# Altium PCB PCB1.PcbDoc
Units mm, origin at the board's own origin, x right, y up, seen from the top; angles counter-clockwise.
Board outline 38.5 x 37 mm, 4 copper layers (L1(SIGNAL), L2(GND), L3(GND), L4(Signal)), stack 1.57 mm thick; 35 components, 27 nets, 170 pads, 52 vias.
Unrouted connection lines stored in the file: 3.
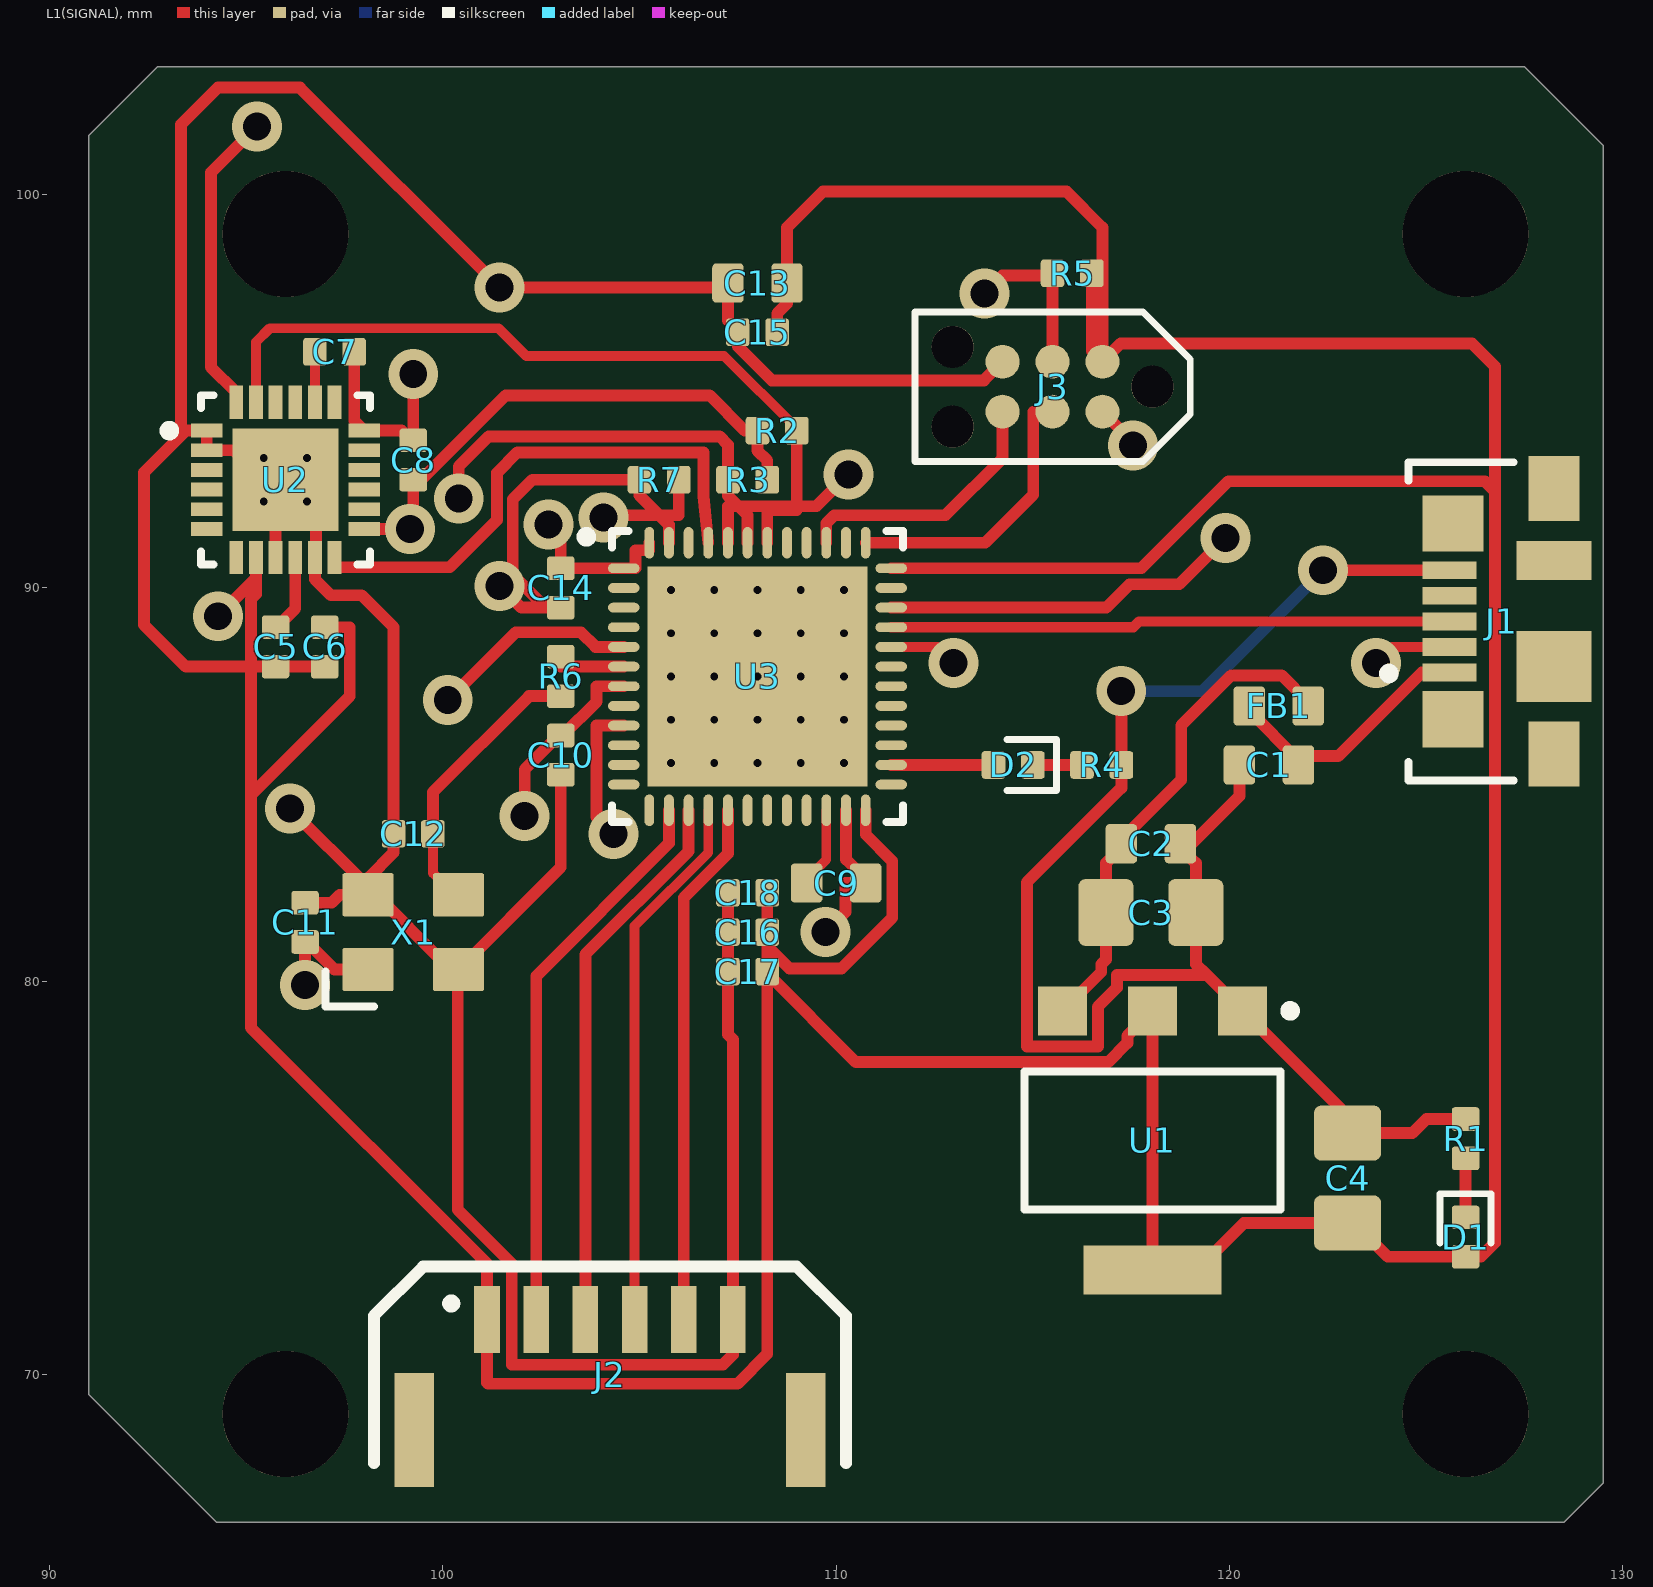
[diagram p0: L1(SIGNAL) view]
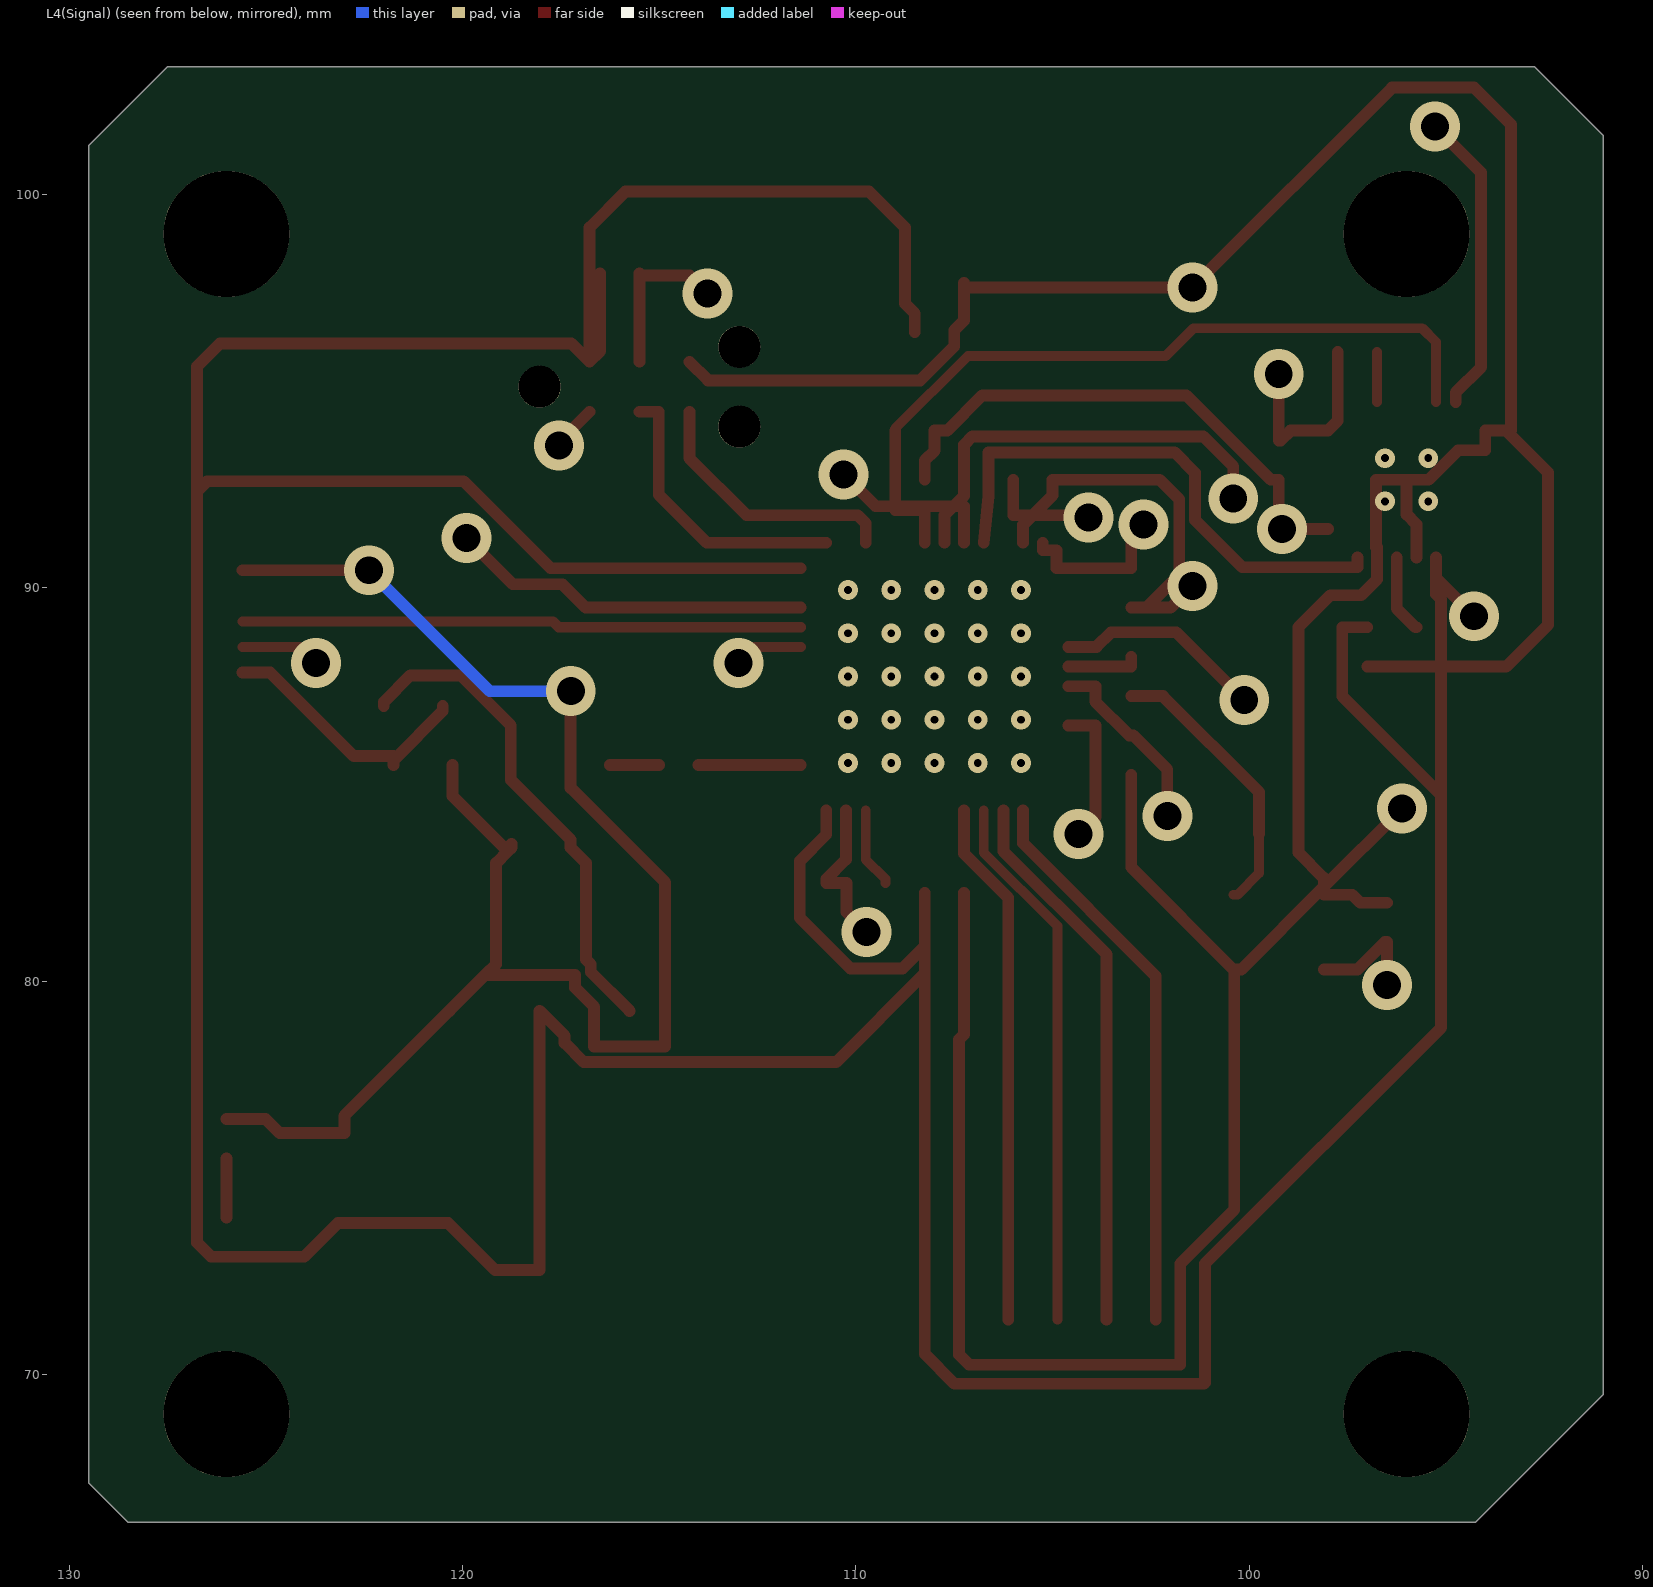
[diagram p1: L4(Signal) view, seen from below]
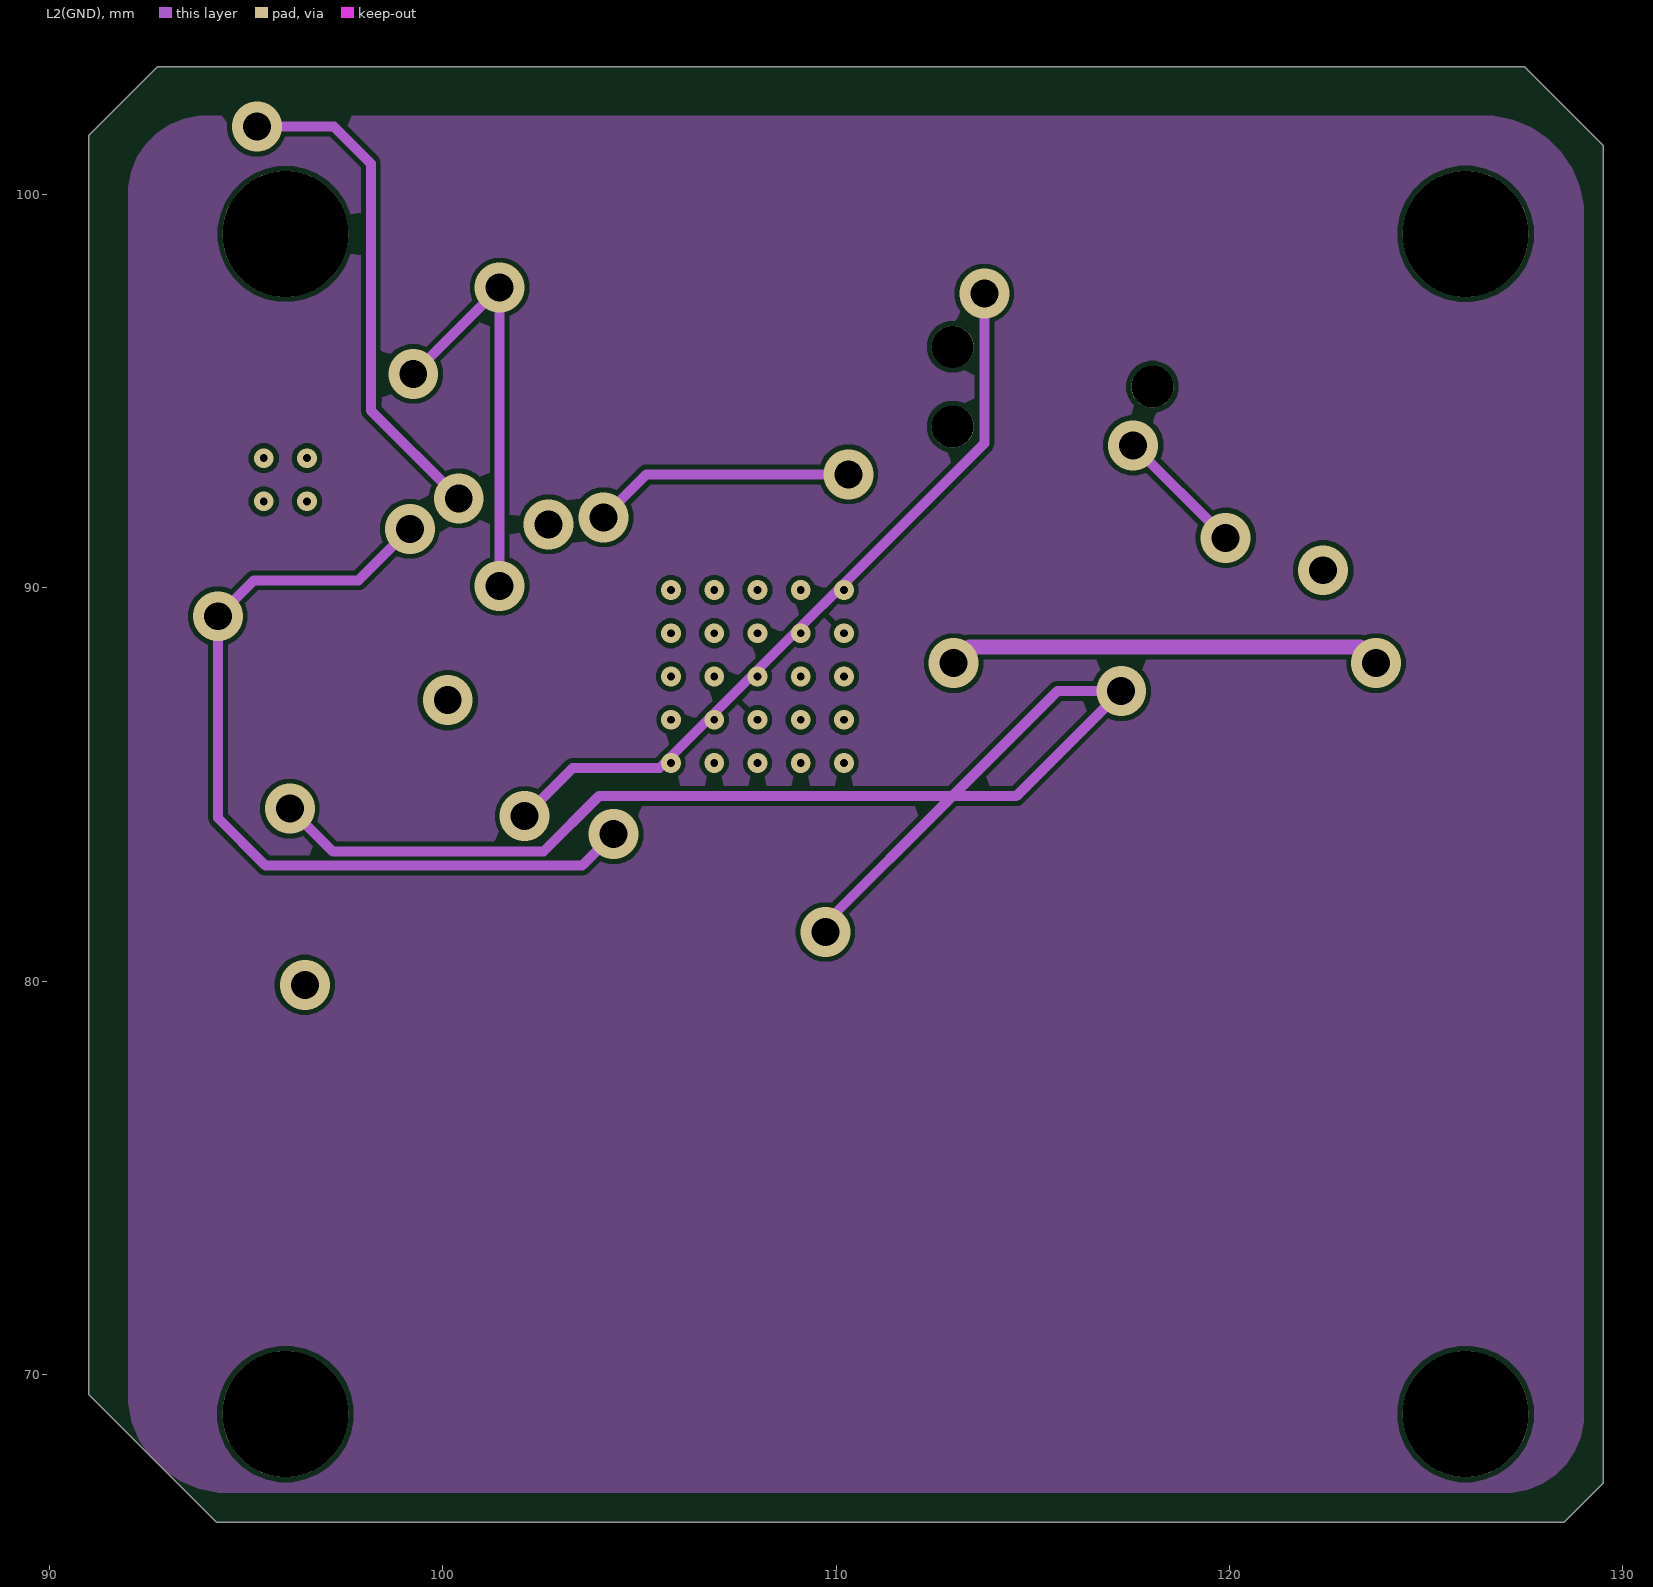
[diagram p2: L2(GND)]
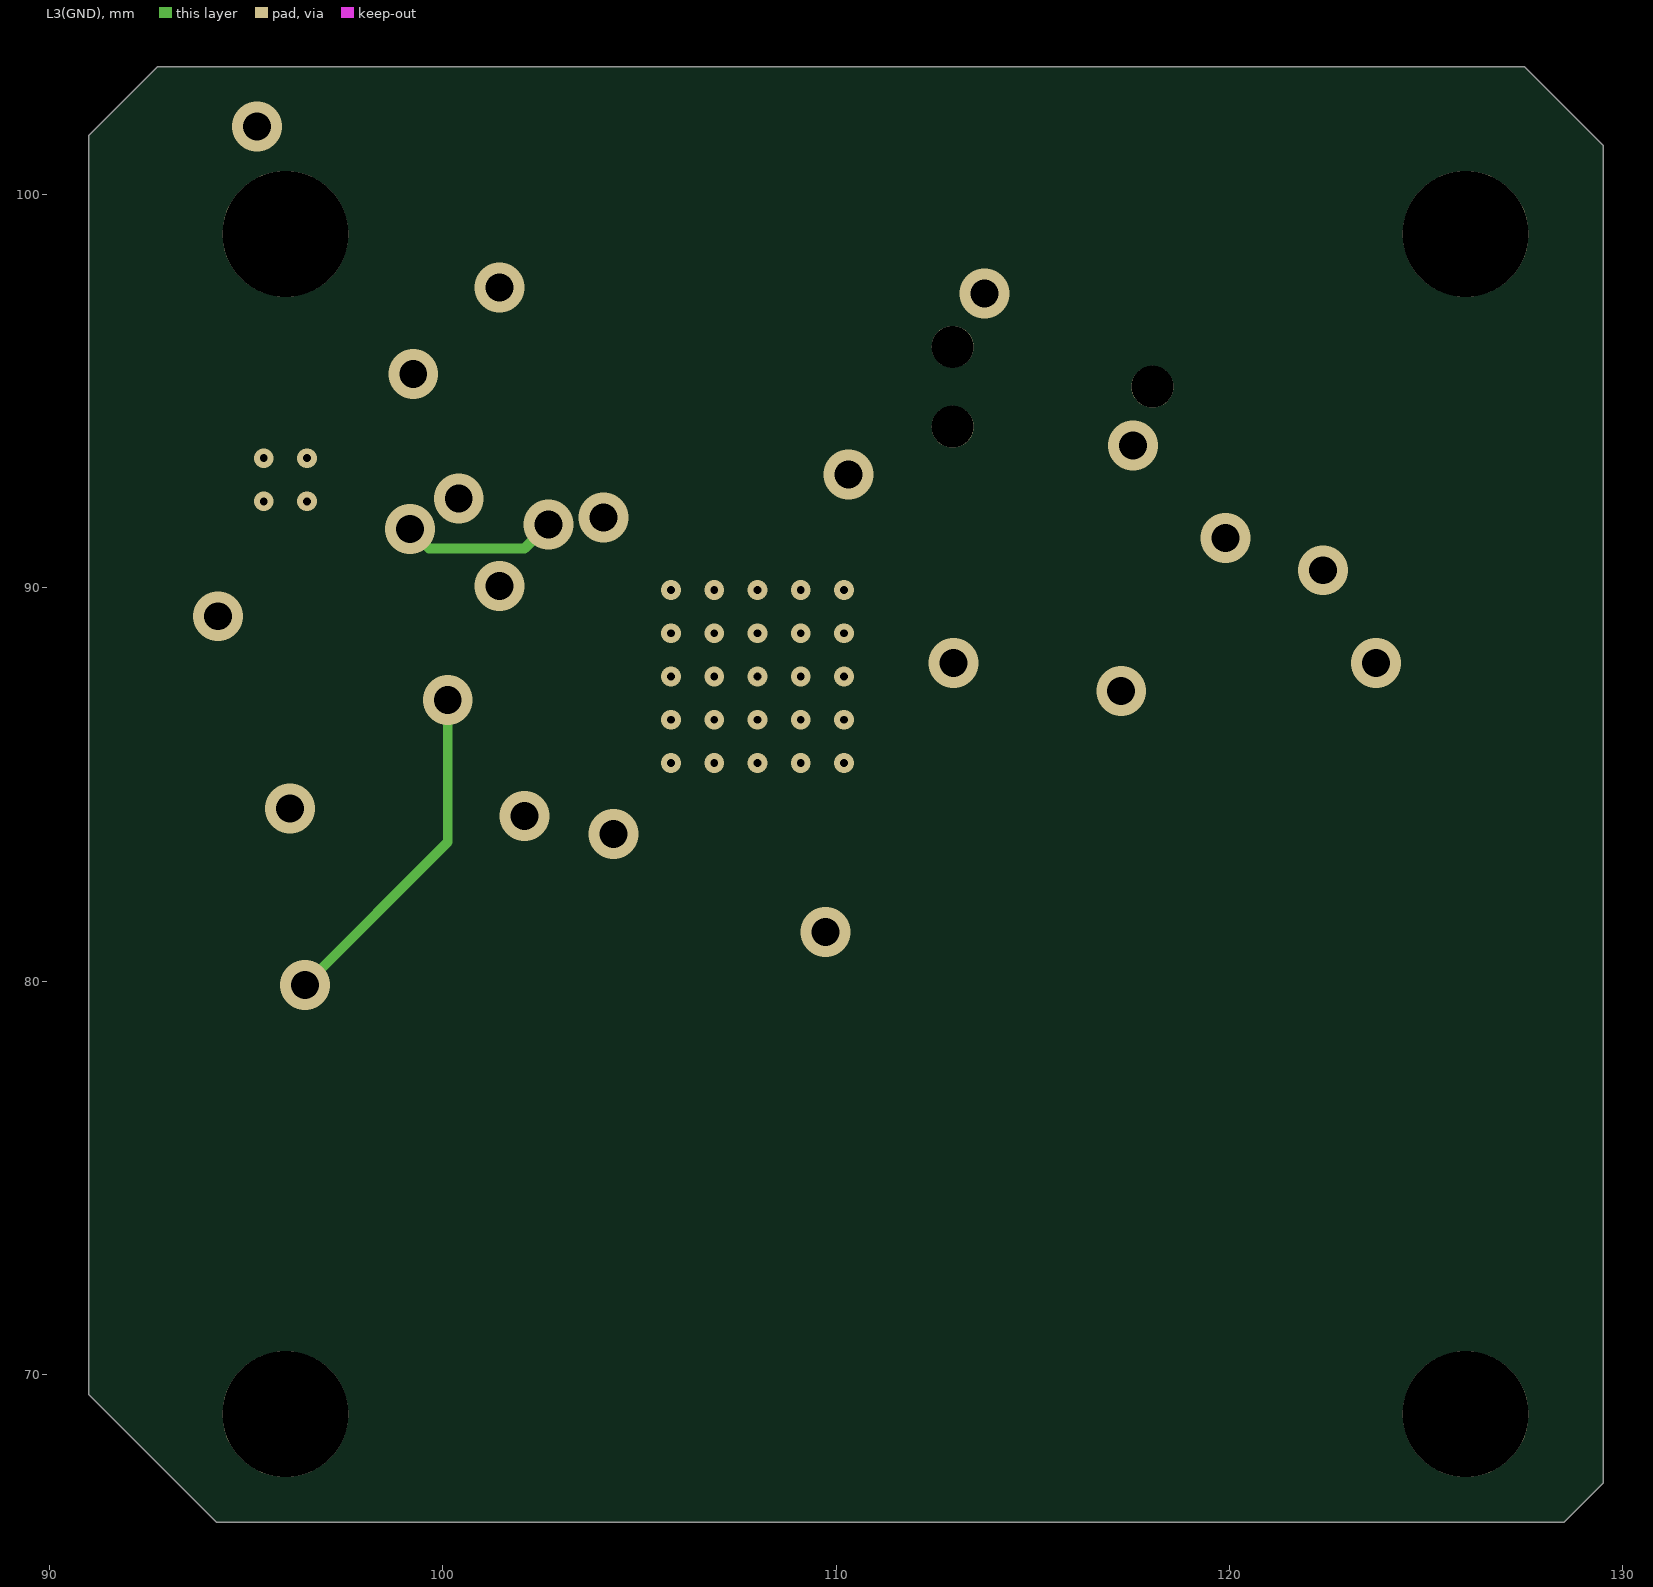
[diagram p3: L3(GND)]
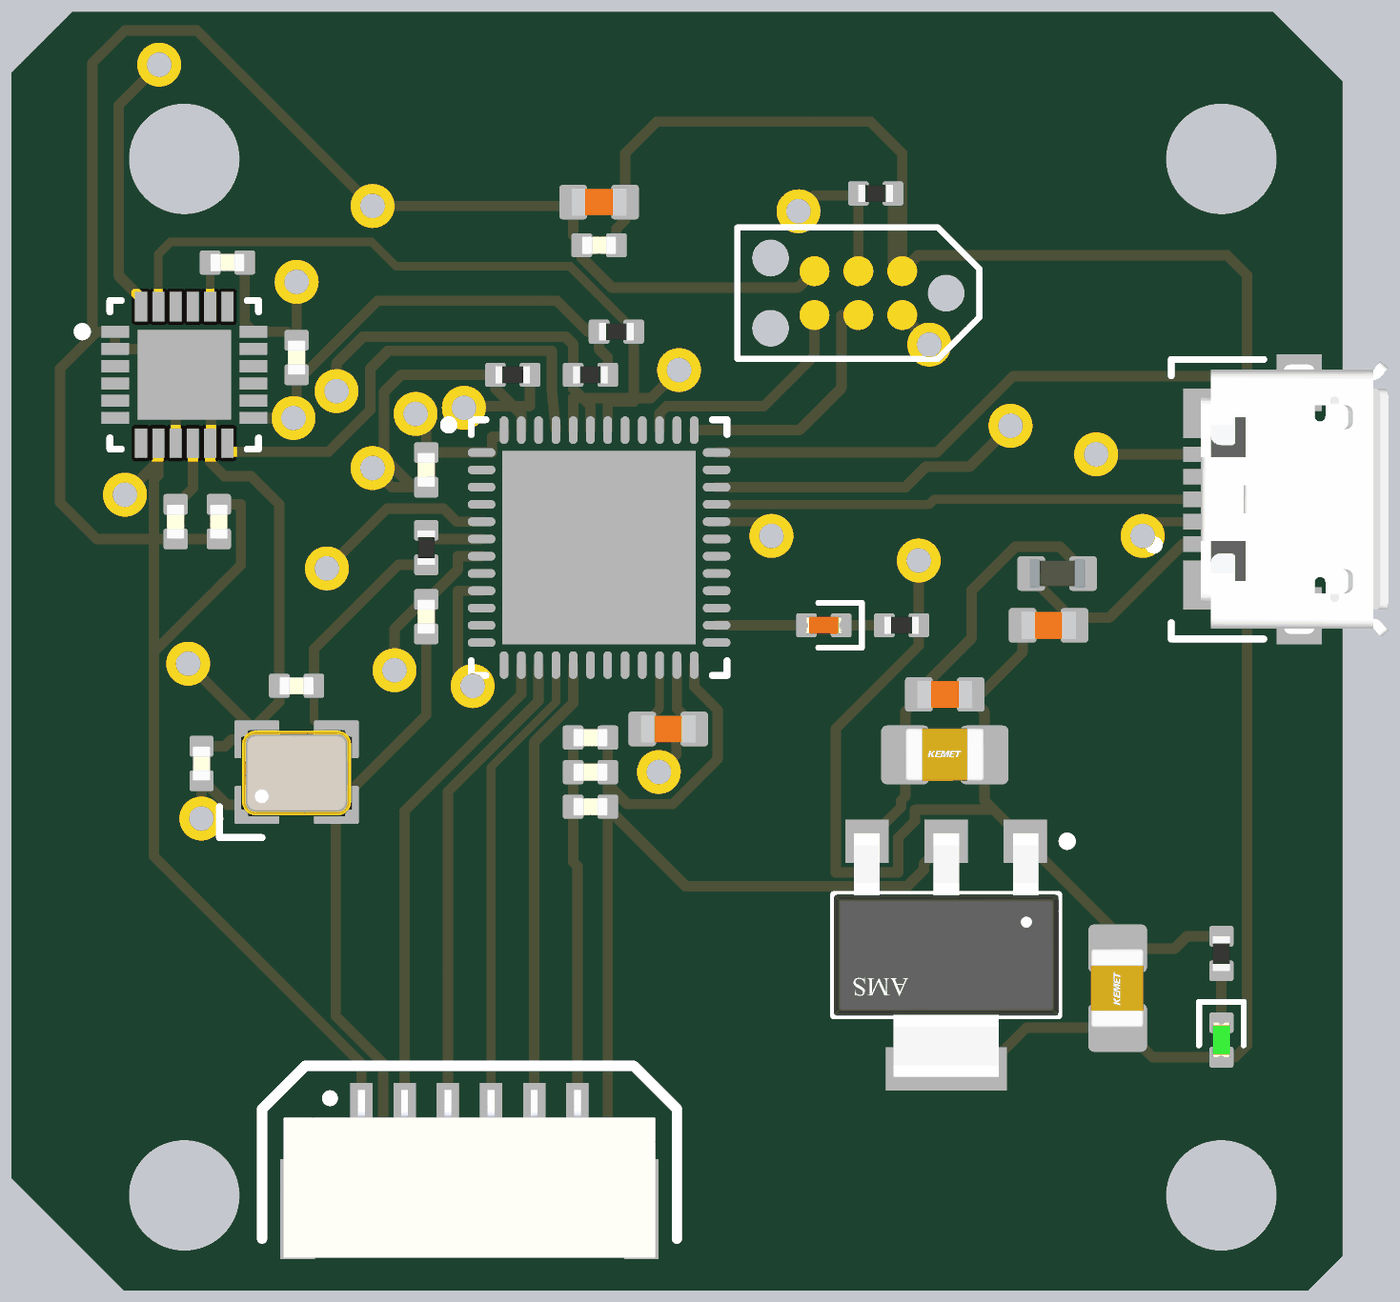
[diagram p4: 3D render of the assembled board from above, using the file's embedded part models]

## Layer stack, top to bottom
Top Solder: solder mask 0.0254, SM-001, Dk 4
L1(SIGNAL): signal copper 0.035
Dielectric 1: prepreg 0.2, PP-017, Dk 4.6
L2(GND): signal copper 0.0175
Dielectric 3: core 1.065, Core-039, Dk 4.6
L3(GND): signal copper 0.0175
Dielectric 5: prepreg 0.2, PP-017, Dk 4.6
L4(Signal): signal copper 0.035
Bottom Solder: solder mask 0.0254, SM-001, Dk 4

## Board outline
91,69.5 91,101.5 92.75,103.25 127.5,103.25 129.5,101.25 129.5,67.25 128.5,66.25 94.25,66.25

## Design rules (kind name [scope] priority, off if disabled: settings)
Clearance [All] p1: gap=0.127 ignorepadtopadclearanceinfootprint=FALSE except(0.1: Arc-Arc Arc-Track Track-Track)
DiffPairsRouting [All] p1: maxlimit=0.254 minlimit=0.203 mostfreqgap=0.254 toplayer_maxgap=0.203 toplayer_prefgap=0.203 toplayer_minwidth=0.26 toplayer_maxwidth=0.26 toplayer_prefwidth=0.26 bottomlayer_maxgap=0.203 bottomlayer_prefgap=0.203 bottomlayer_minwidth=0.26 bottomlayer_maxwidth=0.26 bottomlayer_prefwidth=0.26 impedanceprofiledriven=TRUE impedanceprofileid={38747BA0-CD67-44B4-9E5F-A72D387E2355} impedanceprofilevalue=90.000000 maxuncoupledlength=12.7
PolygonConnect [All] p1: connectstyle=Direct reliefconductorwidth=0.254 reliefentries=4 polygonreliefangle="90 Angle" airgapwidth=0.254
RoutingVias [All] p1: holewidth=0.711 width=1.27 viastyle="Through Hole" minholewidth=0.711 minwidth=1.27 maxholewidth=0.711 maxwidth=1.27
SolderMaskExpansion [All] p1: expansion=0 istentingtop=FALSE
SupplyNets "Schematic Supply Nets_3" [InNet('3V3')] p1: voltage=0.000
SupplyNets "Schematic Supply Nets_2" [InNet('VBUS')] p2: voltage=0.000
SupplyNets "Schematic Supply Nets_1" [InNet('GND')] p3: voltage=0.000
SupplyNets "Schematic Supply Nets" [InNet('+5')] p4: voltage=0.000
UnRoutedNet [All] p1: checkbadconnections=TRUE
Width [All] p1: maxlimit=1 minlimit=0.2 preferedwidth=0.3 midlayer1_minwidth=0.254 midlayer1_maxwidth=0.254 midlayer1_prefwidth=0.254 midlayer2_minwidth=0.254 midlayer2_maxwidth=0.254 midlayer2_prefwidth=0.254 minimp=50.000000 maximp=50.000000 favimp=50.000000
28 further rules are at their usual default settings.

## Classes and differential pairs
differential pair class DIFF_USB: USB_D
differential pair USB_D: +USB_D_P -USB_D_N

## Components (designator, comment, footprint, x,y, rotation, side; value= is the part's Value field where it differs from the comment)
C1 "2u2" CAP_0603 121,85.5 r0 top
C2 "2u2" CAP_0603 118,83.5 r180 top
C3 "22u" CAP_0805 118,81.75 r0 top
C4 "22u" CAP_0805 123,75 r90 top
C5 "100n" CAP_0402 95.75,88.5 r90 top
C6 "10n" CAP_0402 97,88.5 r90 top
C7 "2n2" CAP_0402 97.25,96 r180 top
C8 "100n" CAP_0402 99.25,93.25 r270 top
C9 "2u2" CAP_0603 110,82.5 r180 top
C10 "100n" CAP_0402 103,85.75 r90 top
C11 "10p" CAP_0402 96.5,81.5 r270 top
C12 "10p" CAP_0402 99.25,83.75 r0 top
C13 "2u2" CAP_0603 108,97.75 r0 top
C14 "100n" CAP_0402 103,90 r90 top
C15 "100n" CAP_0402 108,96.5 r0 top
C16 "100n" CAP_0402 107.75,81.25 r0 top
C17 "100n" CAP_0402 107.75,80.25 r0 top
C18 "100n" CAP_0402 107.75,82.25 r0 top
D1 "GREEN" LED_0402_GREEN 126,73.5 r90 top
D2 "RED" LED_0402_RED 114.5,85.5 r0 top
FB1 "120R" FB_0603 121.25,87 r0 top
J1 "473460001" FP-473460001-MFG 127.9,89.15 r90 top
J2 "SM06B-GHS-TB" SM06B-GHS-TB 104.25,70 r0 top
J3 "TC2030-NL" TC2030-NL-FP 115.5,95.115 r180 top
R1 "1k" RES_0402 126,76 r270 top
R2 "2k2" RES_0402 108.5,94 r180 top
R3 "2k2" RES_0402 107.75,92.75 r0 top
R4 "1k" RES_0402 116.75,85.5 r180 top
R5 "10k" RES_0402 116,98 r0 top
R6 "0R" RES_0402 103,87.75 r90 top
R7 "10k" RES_0402 105.5,92.75 r0 top
U1 "AMS1117-3.3" FP-AMS1117-IPC_C 118.04,75.955 r270 top
U2 "MPU-6050" IS-QFN-24_V 96,92.75 r0 top
U3 "STM32F411CEU6" STM-UFQFPN48_L 108,87.75 r0 top
X1 "24MHz" XTAL_3225 99.25,81.25 r0 top

## Footprints (in the part's own frame and the unit in brackets; to place one, negate y for a bottom-side part, rotate by r counter-clockwise, add the part's x,y. Pads: shape width x height; smd on the part's side, far side on the other; paste and mask are expansions set on the pad)
CAP_0402 [mm]
  rrect25% 0.6x0.7 smd: 1(-0.5,0) 2(0.5,0)
  body extent -0.5,-0.26 0.5,0.26, height 0.37
CAP_0603 [mm]
  rrect25% 0.8x1 smd: 1(-0.75,0) 2(0.75,0)
  body extent -0.8,-0.4 0.8,0.4, height 0.51
CAP_0805 [mm]
  rrect25% 1.4x1.7 smd: 1(-1.143,0) 2(1.143,0)
  body extent -1.15,-0.76 1.15,0.79, height 1.01
FB_0603 [mm]
  rrect25% 0.8x1 smd: 1(-0.75,0) 2(0.75,0)
  body extent -0.8,-0.4 0.8,0.4, height 0.81
FP-473460001-MFG [mm]
  rect 0.45x1.38 smd paste+0 mask+0: 1(-1.3,2.31) 2(-0.65,2.31) 3(0,2.31) 4(0.65,2.31) 5(1.3,2.31)
  rect 1.425x1.55 smd paste+0 mask+0: 6(-2.487,2.225) 7(2.488,2.225)
  rect 1.65x1.3 smd paste+0 mask+0: 8(-3.375,-0.35) 11(3.375,-0.35)
  rect 1.8x1.9 smd paste+0 mask+0: 9(-1.15,-0.35)
  rect 1x1.9 smd paste+0 mask+0: 10(1.55,-0.35)
  silkscreen extent -4.05,0.68 4.04,3.97, body extent -4.3,-2.48 4.3,3.45, height 0.25
FP-AMS1117-IPC_C [mm]
  rect 1.25x1.25 smd paste+0 mask+0: 1(-3.295,2.29) 2(-3.295,0) 3(-3.295,-2.29)
  rect 1.25x3.5 smd paste+0 mask+0: 4(3.295,0)
  silkscreen extent -3.42,-3.25 1.75,3.63, body extent -3.9,-3.35 3.9,3.35, height 0.25
IS-QFN-24_V [mm] "QFN, 24-Leads, Body 4x4mm, Pitch 0.5mm, Thermal Pad 2.7x2.6mm"
  rect 0.8x0.35 smd: 1(-2,1.25) 2(-2,0.75) 3(-2,0.25) 4(-2,-0.25) 5(-2,-0.75) 6(-2,-1.25) 13(2,-1.25) 14(2,-0.75) 15(2,-0.25) 16(2,0.25) 17(2,0.75) 18(2,1.25)
  rect 0.35x0.85 smd mask+0.102: 7(-1.25,-1.975) 8(-0.75,-1.975) 9(-0.25,-1.975) 10(0.25,-1.975) 11(0.75,-1.975) 12(1.25,-1.975) 19(1.25,1.975) 20(0.75,1.975) 21(0.25,1.975) 22(-0.25,1.975) 23(-0.75,1.975) 24(-1.25,1.975)
  rect 2.7x2.6 smd: 25(0,0)
  silkscreen extent -3.07,-2.15 2.15,2.15, body extent -2,-2 2,2, height 0.95
LED_0402_GREEN [mm]
  rrect25% 0.6x0.7 smd: A(-0.5,0) K(0.5,0)
  silkscreen extent -0.15,-0.65 1.1,0.65, body extent -0.51,-0.25 0.51,0.25, height 0.45
LED_0402_RED [mm]
  rrect25% 0.6x0.7 smd: A(-0.5,0) K(0.5,0)
  silkscreen extent -0.15,-0.65 1.1,0.65, body extent -0.51,-0.25 0.51,0.25, height 0.45
RES_0402 [mm]
  rrect25% 0.6x0.7 smd: 1(-0.5,0) 2(0.5,0)
  body extent -0.5,-0.25 0.5,0.25, height 0.3
SM06B-GHS-TB [mm]
  rect 0.65x1.7 smd: 1(-3.125,1.4) 2(-1.875,1.4) 3(-0.625,1.4) 4(0.625,1.4) 5(1.875,1.4) 6(3.125,1.4)
  rect 1x2.9 smd: ""(-4.975,-1.4) ""(4.975,-1.4)
  silkscreen extent -6,-2.25 6,2.75, body extent -5.38,-2.8 5.38,2.05, height 4.26
STM-UFQFPN48_L [mm] "QFN, 48-Leads, Body 7.1x7.1mm, Pitch 0.5mm, Thermal Pad 5.6x5.6mm, IPC High Density"
  oval 0.8x0.25 smd: 1(-3.4,2.75) 2(-3.4,2.25) 3(-3.4,1.75) 4(-3.4,1.25) 5(-3.4,0.75) 6(-3.4,0.25) 7(-3.4,-0.25) 8(-3.4,-0.75) 9(-3.4,-1.25) 10(-3.4,-1.75) 11(-3.4,-2.25) 12(-3.4,-2.75) 25(3.4,-2.75) 26(3.4,-2.25) 27(3.4,-1.75) 28(3.4,-1.25) 29(3.4,-0.75) 30(3.4,-0.25) 31(3.4,0.25) 32(3.4,0.75) 33(3.4,1.25) 34(3.4,1.75) 35(3.4,2.25) 36(3.4,2.75)
  oval 0.25x0.8 smd: 13(-2.75,-3.4) 14(-2.25,-3.4) 15(-1.75,-3.4) 16(-1.25,-3.4) 17(-0.75,-3.4) 18(-0.25,-3.4) 19(0.25,-3.4) 20(0.75,-3.4) 21(1.25,-3.4) 22(1.75,-3.4) 23(2.25,-3.4) 24(2.75,-3.4) 37(2.75,3.4) 38(2.25,3.4) 39(1.75,3.4) 40(1.25,3.4) 41(0.75,3.4) 42(0.25,3.4) 43(-0.25,3.4) 44(-0.75,3.4) 45(-1.25,3.4) 46(-1.75,3.4) 47(-2.25,3.4) 48(-2.75,3.4)
  rect 5.6x5.6 smd: 49(0,0)
  silkscreen extent -4.47,-3.7 3.7,3.7, body extent -3.55,-3.55 3.55,3.55, height 0.6
TC2030-NL-FP [mil]
  round 33.98 smd paste-16.99: 1(-50,-25) 2(-50,25) 3(0,-25) 4(0,25) 5(50,-25) 6(50,25)
  round 42.01 hole 42.01 unplated: MH(-100,0) MH(100,-40) MH(100,40)
  silkscreen extent -138,-75 138,75
XTAL_3225 [mm]
  rrect10% 1.3x1.1 smd: 1(-1.15,-0.95) 2(1.15,-0.95) 3(1.15,0.95) 4(-1.15,0.95)
  silkscreen extent -2.23,-1.89 -1,-1, body extent -1.6,-1.28 1.6,1.22, height 0.61

## Part data
C1 C2 C9 C13: library part CAP_0603, "Capacitor SMD 0603"
C3 C4: library part CAP_0805, "Capacitor SMD 0805"
C5 C6 C7 C8 C10 C11 C12 C14 C15 C16 C17 C18: library part CAP_0402, "Capacitor SMD 0402"
D1: library part LED_0402_GREEN, "LED 0402 GREEN SMD"
D2: library part LED_0402_RED, "LED 0402 RED SMD"
FB1: library part FB_0603, "Ferrite Bead SMD 0603"
J1: library part CMP-2000-05246-2, "CONN RCPT USB2.0 MICRO B SMD R/A", Current Rating=1.8A, Manufacturer=Molex, Package=0, Temperature="-30°C to +85°C", Temperature Range High=+85°C, Temperature Range Low=-30°C, Voltage Rating=30V, Automotive=No, Category=Conn, ComponentLink2Description=Datasheet, ComponentLink2URL=https://www.molex.com/webdocs/datasheets/pdf/en-us/0473460001_IO_CONNECTORS.pdf, Conn Orientation="Right Angle", Contact Material=Gold,Nickel, Device Class L1=Connectors, Device Class L2="USB Connectors", Device Class L3=unset, Digikey Description="CONN RCPT USB2.0 MICRO B SMD R/A", Footprint Url=https://www.molex.com/pdm_docs/sd/473460001_sd.pdf, Height=2.945mm, Is Female=yes, Lead Free=Yes, Manufacturer Part Number=473460001, Number Of Contacts=5, Octopart=https://octopart.com/47346-0001-molex-7164928, Pitch=0.65mm, RoHS=TRUE, Shielding=true, Usb Standard="USB 2.0"
J2: "Header Connector 6 Position 1.25MM Pitch SMD Horizontal JST GH", Manufacturer=JST, Manufacturer Part Number=SM06B-GHS-TB
J3: "Tag-Connect No-Solder SWD Debug Connector (No Legs) DO NOT PLACE", Manufacturer=Tag-Connect, Manufacturer Part Number=TC2030-NL-FP
R1 R2 R3 R4 R5 R6 R7: library part RES_0402, "Resistor SMD 0402"
U1: library part CMP-209535-000001-1, "LDO Voltage Regulators 1A, 3.3V", Dropout Voltage=1.1V, Manufacturer="Advanced Monolithic Systems", Max Junction Temp=+125°C, Max Power Dissipation=1.2W, Max Supply Voltage=15V, Nominal Supply Current=5mA, Output Current=1A, Output Voltage=3.3V, Package=AMS1117, Temperature="-40°C to +125°C", Temperature Range Low=-40°C, Automotive=No, Category=IC, ComponentLink2Description=Datasheet, ComponentLink2URL=http://www.advanced-monolithic.com/pdf/ds1117.pdf, Device Class L1="Integrated Circuits (ICs)", Device Class L2="Power Management ICs", Device Class L3="Voltage Regulators - Linear", Height=1.8mm, Ipc Land Pattern Name=SOT229P700X180-4, Lead Free=Yes, Manufacturer Part Number=AMS1117-3.3, Number Of Outputs=1, Octopart=https://octopart.com/ams1117-3.3-advanced+monolithic+systems-25899300, Output Type=Fixed, RoHS=TRUE, Standoff Height=0.64mm, Temperature Range High=+125°C
U2: library part CMP-1753-00002-2, "3-Axis Gyroscope, Accelerometer and a Digital Motion Processor(TM) (DMP), 2.375 to 3.46 V, -40 to 85 degC, 24-Pin QFN, RoHS, Tape and Reel", Manufacturer=InvenSense, Standard Package=5,000, Category=Sensors,Transducers, Datasheet URL=http://datasheet.octopart.com/MPU-6050-InvenSense-datasheet-14421344.pdf, Datasheet Version="Rev. 3.3, 05/2012", Dynamic Catalog=MPU-6000™Series, Family=Multifunction, Featured Product=MPU-60506-Axis,IntegratedI²CSolution, Manufacturer URL=http://www.invensense.com/, Online Catalog=MPU-6000™Series, Other Names="1428-1007-2 / MPU6050", Output Type=Digital, Sensor Type=MotionTracking, Unit PriceUSD=Digital
U3: library part CMP-0243-00165-1, "ARM Cortex-M4 32-bit MCU+FPU, 512 KB Flash, 128 KB RAM, 36 I/Os, 48-Pin UFQFPN, -40 to 85 degC, Tray", I/Os (High Current)=36, Operating Frequency(F) (Processor speed) (MHz)=100, Package Description=UFQFPN48, Package Reference="48-Pin Ultra Thin Fine Pitch Quad Flat No-Lead, 7 x 7 x 0.6 mm Body, 0.5 mm Pitch, Exposed Pad", Supply Voltage(Vcc) min (V)=1.7, ComponentLink1Description="Manufacturer URL", ComponentLink1URL=http://www.st.com/, ComponentLink2Description=Datasheet, ComponentLink2URL=http://www.st.com/st-web-ui/static/active/en/resource/technical/document/datasheet/DM00115249.pdf, Core="ARM Cortex-M4", DatasheetVersion="Rev. 6", FLASH Size (Prog) (kB)=512, Internal RAM Size (kB)=128, Mounting Technology="Surface Mount", Packing=Tray
X1: library part TSX-3225_24.0000MF15X-AC, "Crystal SMD 24MHz 10PPM 7pF 3225", Manufacturer=Epson, Manufacturer Part Number="TSX-3225 24.0000MF15X-AC"

## Free pads (board coordinates)
  round 3.2 hole 3.2 unplated: H1(96,69) H1(96,99) H1(126,69) H1(126,99)

## Via types
v1: diameter 0.5, hole 0.2, L1(SIGNAL) to L4(Signal), 29 vias
v2: diameter 1.27, hole 0.711, L1(SIGNAL) to L4(Signal), 23 vias

## Nets (pads, with @x,y where several pads share a name; then routed paths per layer and width w, separated by ;. In a path a pad name is that pad's centre, name@x,y a point inside that pad or via, vN(x,y) a via of type N, cw(c..) or ccw(c..) an arc to the next point about the centre after c; other vN are vias at no path point)
3V3: C4.1 C6.2 C8.2 C13.2 C14.2 C15.2 C16.2 C17.2 C18.2 D1.A J2.1 J3.1 R2.2 R3.2 R5.2 U1.2 U1.4 U2.8 U2.13 U3.1 U3.9 U3.24 U3.36 U3.48 | length 198.5
  L1(SIGNAL) w0.3: v2(94.285,89.281) 95.25,90.246 ; U2.8 95.25,90.246 ; C6.2 97.638,89 97.638,87.249 95.123,84.734 ; U2.13 v2@98.755,91.5 ; v2(99.162,91.5) v2@98.755,91.5 ; v2(102.692,91.618) 103,91.31 C14.2 U3.1 104.902,90.5 104.902,90.957 105.25,90.957 U3.48 ; v2(104.343,83.744) 103.911,84.176 103.911,86.5 U3.9 ; C18.2 C16.2 108.25,80.892 ; R3.2 108.25,93.243 108,93.493 R2.2 107.676,94 106.782,94.894 101.6,94.894 99.456,92.75 C8.2 99.25,91.995 v2@98.755,91.5 ; C15.2 108.5,96.977 108.75,97.227 C13.2 108.75,99.162 109.664,100.076 115.856,100.076 116.77,99.162 J3.1 ; U3.24 110.75,83.733 111.427,83.056 111.427,81.619 110.134,80.326 108.816,80.326 108.571,80.571 108.25,80.892 ; U3.36 117.76,90.5 119.97,92.71 126.492,92.71 126.746,92.456 ; R5.2 116.5,96.02 J3.1 ; 95.123,84.734 95.123,89.713 95.25,89.84 95.25,90.246 ; 95.123,84.734 95.123,78.824 101.125,72.822 J2.1 101.125,69.796 101.147,69.774 107.493,69.774 108.25,70.531 C17.2@108.25,80.2 ; C17.2@108.25,80.2 C17.2 108.25,80.892 ; C17.2@108.25,80.2 110.502,77.948 116.915,77.948 117.402,78.435 117.402,78.612 U1.2 U1.4 119.165,72.66 120.362,73.857 C4.1 123.164,73.857 124.021,73 D1.A 126.391,73 126.746,73.355 126.746,92.456 ; J3.1 117.235,96.215 126.162,96.215 126.746,95.631 126.746,92.456
  L2(GND) w0.254: v2(99.162,91.5) 97.857,90.195 95.199,90.195 v2(94.285,89.281) 94.285,84.15 95.49,82.945 103.544,82.945 v2(104.343,83.744)
  L3(GND) w0.254: v2(99.162,91.5) 99.653,91.008 102.083,91.008 v2(102.692,91.618)
+5: C2.2 C3.1 FB1.2 U1.3 | length 12.6
  L1(SIGNAL) w0.3: U1.3 116.738,80.238 116.738,80.433 116.857,80.552 C3.1 116.857,83.007 117.25,83.4 C2.2 117.25,83.6 118.772,85.122 118.772,86.505 120.044,87.777 121.323,87.777 122,87.1 FB1.2
GND: C1.1 C2.1 C3.2 C4.2 C5.1 C6.1 C7.1 C8.1 C9.1 C10.1 C11.1 C12.1 C13.1 C14.1 C15.1 C16.1 C17.1 C18.1 J1.5 J2.6 J3.5 R1.1 R4.1 R7.1 U1.1 U2.1 U2.2 U2.9 U2.11 U2.18 U2.25 U3.8 U3.23 U3.35 U3.47 U3.49 X1.2 X1.4 | length 208.2
  L1(SIGNAL) w0.3: U2.9 95.75,91.618 96,91.868 U2.25 ; v2(96.114,84.389) X1.4@98.1,82.403 ; C11.1 97.18,82 97.38,82.2 X1.4 X1.4@98.1,82.403 ; C6.1 C5.1 93.472,88 92.405,89.067 92.405,92.933 93.472,94 ; C7.1 97.75,94.25 U2.18 98.95,94 99.2,93.75 C8.1 v2(99.25,95.44) ; v2(101.448,90.052) 102,89.5 102.616,89.5 ; C10.1 103,82.9 X1.2 X1.2@100.381,80.3 ; C14.1 102.616,89.5 ; U3.47 105.75,91.604 105,92.354 R7.1 102.277,92.75 101.78,92.253 101.78,90.336 102.616,89.5 ; C18.1 C16.1 C17.1 107.25,78.65 107.375,78.525 J2.6 107.375,70.51 107.121,70.256 101.752,70.256 101.752,72.822 100.381,74.193 X1.2@100.381,80.3 ; C13.1 C13.1@107.25,97.638 ; v2(109.728,81.255) 110.236,81.763 110.236,82.5 C9.1 110.75,82.6 110.25,83.1 U3.23 ; J3.5 113.755,95.275 108.364,95.275 107.5,96.139 C15.1 107.5,96.55 107.25,96.8 C13.1@107.25,97.638 ; v2(117.246,87.376) 117.25,87.372 R4.1 117.25,84.916 114.848,82.514 114.848,78.348 116.652,78.348 116.652,79.35 117.138,79.836 117.138,80.162 119.418,80.162 ; C2.1 118.75,83.4 C2.1@118.845,83.305 ; C1.1 120.25,84.71 C2.1@118.845,83.305 ; v2(122.378,90.45) J1.5 ; R1.1 125.003,76.5 124.646,76.143 C4.2 123,76.58 U1.1 119.418,80.162 ; 93.472,94 U2.1 U2.2 94.691,93.5 95.441,92.75 U2.25 ; 93.472,94 93.345,94 93.345,101.778 94.285,102.718 96.368,102.718 v2(101.448,97.638) C13.1@107.25,97.638 ; U2.25 96.774,92.75 96.774,91.034 96.75,91.034 U2.11 96.75,90.221 97.156,89.814 97.937,89.814 98.75,89.002 C12.1 98.75,83.276 98.1,82.626 X1.4@98.1,82.403 ; X1.4@98.1,82.403 100.203,80.3 X1.2@100.381,80.3 ; C2.1@118.845,83.305 119.143,83.007 C3.2 119.143,80.437 119.418,80.162
  L2(GND) w0.254: v2(96.114,84.389) 97.204,83.299 102.558,83.299 103.966,84.707 112.952,84.707 ; v2(99.25,95.44) v2(101.448,97.638) v2(101.448,90.052) ; v2(109.728,81.255) 109.728,81.483 112.952,84.707 ; 112.952,84.707 115.621,87.376 v2(117.246,87.376) 114.578,84.707 112.952,84.707
  L4(Signal) w0.3: v2(117.246,87.376) 119.304,87.376 v2(122.378,90.45)
  other v1: 105.8,85.55 106.9,85.55 108,85.55 109.1,85.55 110.2,85.55 105.8,86.65 106.9,86.65 108,86.65 109.1,86.65 110.2,86.65 105.8,87.75 106.9,87.75 108,87.75 109.1,87.75 110.2,87.75 105.8,88.85 106.9,88.85 108,88.85 109.1,88.85 110.2,88.85 105.8,89.95 106.9,89.95 108,89.95 109.1,89.95 110.2,89.95 95.45,92.2 96.55,92.2 95.45,93.3 96.55,93.3
IMU_CPOUT: C7.2 U2.20 | length 1.3
  L1(SIGNAL) w0.25: U2.20 C7.2
IMU_INT: U2.12 U3.45 | length 13.8
  L1(SIGNAL) w0.3: U2.12 97.25,90.526 100.178,90.526 101.38,91.728 101.38,92.93 101.897,93.447 106.629,93.447 106.629,92.329 U3.45
IMU_REGOUT: C5.2 U2.10 | length 2
  L1(SIGNAL) w0.3: C5.2 95.774,89 96.25,89.476 U2.10
IMU_SCL: R2.1 U2.23 U3.42 | length 20.1
  L1(SIGNAL) w0.25: U2.23 95.25,96.25 95.602,96.602 101.419,96.602 102.123,95.898 107.152,95.898 109,94.05 R2.1
  L1(SIGNAL) w0.3: U3.42 108.25,91.973 109,91.973 R2.1
IMU_SDA: R3.1 U2.24 U3.43 | length 31.2
  L1(SIGNAL) w0.3: U2.24 94.75,94.971 94.107,95.614 94.107,100.559 v2(95.275,101.727) ; v2(100.406,92.278) 100.406,93.091 101.168,93.853 107.036,93.853 107.25,93.639 R3.1 107.25,92.346 107.75,91.846 U3.43
  L2(GND) w0.254: v2(95.275,101.727) 97.231,101.727 98.171,100.787 98.171,94.513 v2(100.406,92.278)
LED_PWR_K: D1.K R1.2 | length 1.5
  L1(SIGNAL) w0.3: D1.K R1.2
MCU_BOOT0: R7.2 U3.44 | length 13.8
  L1(SIGNAL) w0.3: v2(104.089,91.796) 104.14,91.846 106,91.846 R7.2 ; U3.44 107.25,92.075 109.499,92.075 v2(110.312,92.888)
  L2(GND) w0.254: v2(104.089,91.796) 105.181,92.888 v2(110.312,92.888)
MCU_LED_A: D2.A U3.26 | length 2.6
  L1(SIGNAL) w0.3: U3.26 D2.A
MCU_LED_C: D2.K R4.2 | length 1.2
  L1(SIGNAL) w0.3: D2.K R4.2
MCU_NRST: C10.2 J3.3 R5.1 U3.7 | length 28.4
  L1(SIGNAL) w0.3: v2(102.083,84.201) 102.083,85.386 102.946,86.25 C10.2 103.048,86.25 103.911,87.114 103.911,87.5 U3.7 ; v2(113.767,97.485) 114.224,97.942 R5.1@115.5,97.942 ; J3.3 R5.1@115.5,97.942 ; R5.1 R5.1@115.5,97.942
  L2(GND) w0.254: v2(102.083,84.201) 103.302,85.42 105.512,85.42 113.767,93.675 v2(113.767,97.485)
MCU_OSC_IN: C11.2 U3.5 X1.1 | length 17.1
  L1(SIGNAL) w0.3: v2(96.495,79.908) 96.5,79.914 C11.2 96.55,81 97.25,80.3 X1.1 ; v2(100.127,87.147) 101.854,88.875 103.511,88.875 103.886,88.5 U3.5
  L3(GND) w0.254: v2(96.495,79.908) 100.127,83.541 v2(100.127,87.147)
MCU_OSC_OUT: R6.2 U3.6 | length 1.8
  L1(SIGNAL) w0.3: R6.2 103,88 U3.6
MCU_PA4: J2.2 U3.14 | length 14.3
  L1(SIGNAL) w0.3: J2.2 102.375,80.136 105.75,83.511 U3.14
MCU_PA5: J2.3 U3.15 | length 14
  L1(SIGNAL) w0.3: J2.3 103.625,80.683 106.25,83.308 U3.15
MCU_PA6: J2.4 U3.16 | length 13.7
  L1(SIGNAL) w0.25: J2.4 104.875,81.403 106.75,83.278 U3.16
MCU_PA7: J2.5 U3.17 | length 13.4
  L1(SIGNAL) w0.3: J2.5 106.125,82.123 107.25,83.248 U3.17
MCU_SWCLK: J3.4 U3.37 | length 7.4
  L1(SIGNAL) w0.3: U3.37 113.792,91.15 115.011,92.369 115.011,94.48 J3.4
MCU_SWDIO: J3.2 U3.34 | length 13.7
  L1(SIGNAL) w0.3: U3.34 116.865,89.5 117.459,90.094 118.72,90.094 v2(119.901,91.275) ; J3.2 117.551,93.699 v2(117.551,93.624)
  L2(GND) w0.254: v2(117.551,93.624) v2(119.901,91.275)
MCU_SWO: J3.6 U3.39 | length 6.8
  L1(SIGNAL) w0.3: U3.39 109.75,91.643 109.953,91.846 112.776,91.846 114.23,93.3 J3.6
MCU_VCAP1: C9.2 U3.22 | length 2.1
  L1(SIGNAL) w0.25: C9.2 109.25,82.6 109.75,83.1 U3.22
USB_D_N: J1.2 U3.32 | length 14.9
  L1(SIGNAL) w0.26: U3.32 112.573,88.5 v2(112.986,88.087) ; v2(123.723,88.087) 124.136,88.5 J1.2
  L2(GND) w0.381: v2(112.986,88.087) 113.392,88.494 123.317,88.494 v2(123.723,88.087)
USB_D_P: J1.3 U3.33 | length 14.3
  L1(SIGNAL) w0.26: U3.33 117.55,89 117.7,89.15 J1.3
VBUS: C1.2 FB1.1 J1.1 | length 6.8
  L1(SIGNAL) w0.3: FB1.1 120.5,86.873 C1.2@121.75,85.623 ; C1.2 C1.2@121.75,85.623 ; J1.1 124.883,87.85 122.758,85.725 121.75,85.725 C1.2@121.75,85.623
XTAL_IN: C12.2 R6.1 X1.3 | length 7.2
  L1(SIGNAL) w0.25: C12.2 99.75,82.75 100.3,82.2 X1.3
  L1(SIGNAL) w0.3: C12.2 99.75,84.807 102.193,87.25 R6.1
pads on no net: J1.4 J1.6 J1.7 J1.8 J1.9 J1.10 J1.11 J2. J3.MH U2.3 U2.4 U2.5 U2.6 U2.7 U2.14 U2.15 U2.16 U2.17 U2.19 U2.21 U2.22 U3.2 U3.3 U3.4 U3.10 U3.11 U3.12 U3.13 U3.18 U3.19 U3.20 U3.21 U3.25 U3.27 U3.28 U3.29 U3.30 U3.31 U3.38 U3.40 U3.41 U3.46

## Polygon pours and split planes (outlines as drawn)
no net on L2(GND) "NONET_L02_P005" (solid, pour order 5): 127,102.999 cw(c126.952,100.951) 129,100.968 129,69 cw(c127,69) 127,67 94.54,67 cw(c94.54,69.54) 92,69.54 92,100 cw(c95,100) 95.071,102.999
no net on L2(GND) "NONET_L02_P003" (solid, pour order 3): 127,102.999 cw(c126.952,100.951) 129,100.968 129,69 cw(c127,69) 127,67 94.54,67 cw(c94.54,69.54) 92,69.54 92,100 cw(c95,100) 95.071,102.999

## Silkscreen, mask and mechanical layers (free items; w line width, h text height)
Mechanical 1:
  lines w0.254: 91,69.5 91,101.5 92.75,103.25 125.75,103.25 127.5,103.25 129.5,101.25 129.5,67.25 128.5,66.25 94.25,66.25 91,69.5

## Text inside footprints (layer, text, board x,y; h text height)
D1: Mechanical 13 "+" at 125.492,71.617 h0.5 r90
D2: Mechanical 13 "+" at 112.617,86.008 h0.5